# Altium PCB PCB.PcbDoc
Units mm, origin at the board's own origin, x right, y up, seen from the top; angles counter-clockwise.
Board outline 28 x 47 mm, 2 copper layers (Top Layer, Bottom Layer); 22 components, 17 nets, 77 pads, 18 vias.
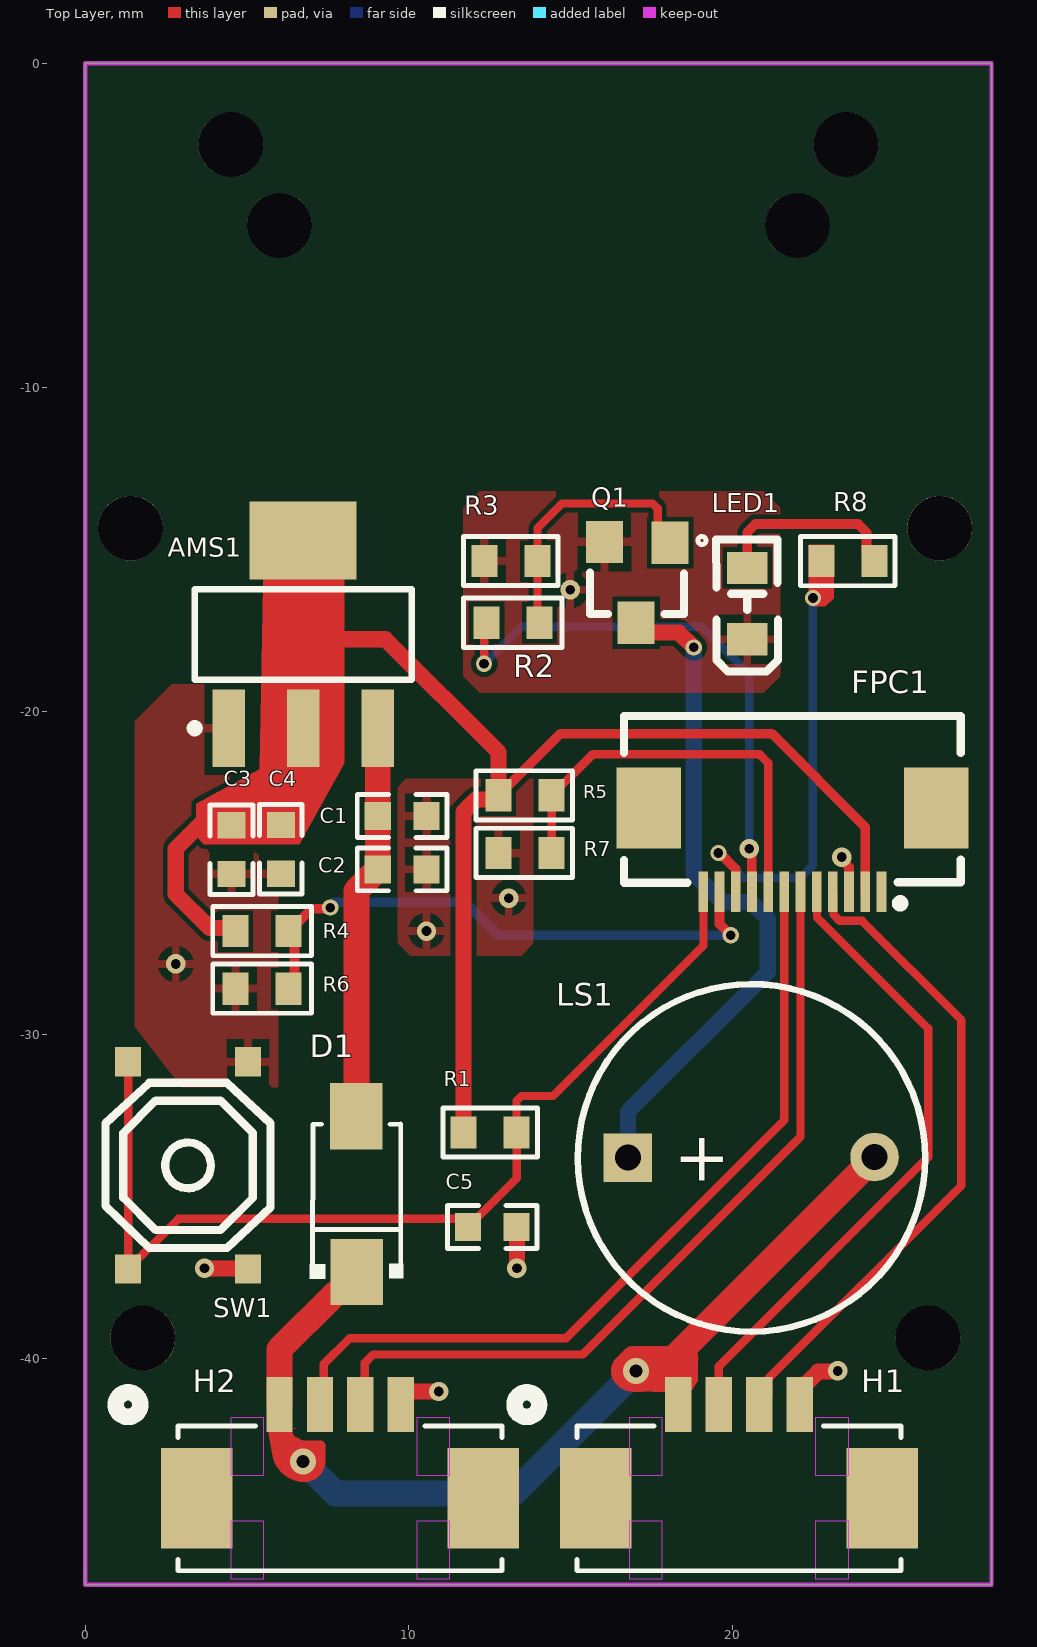
[diagram p0: Top Layer view]
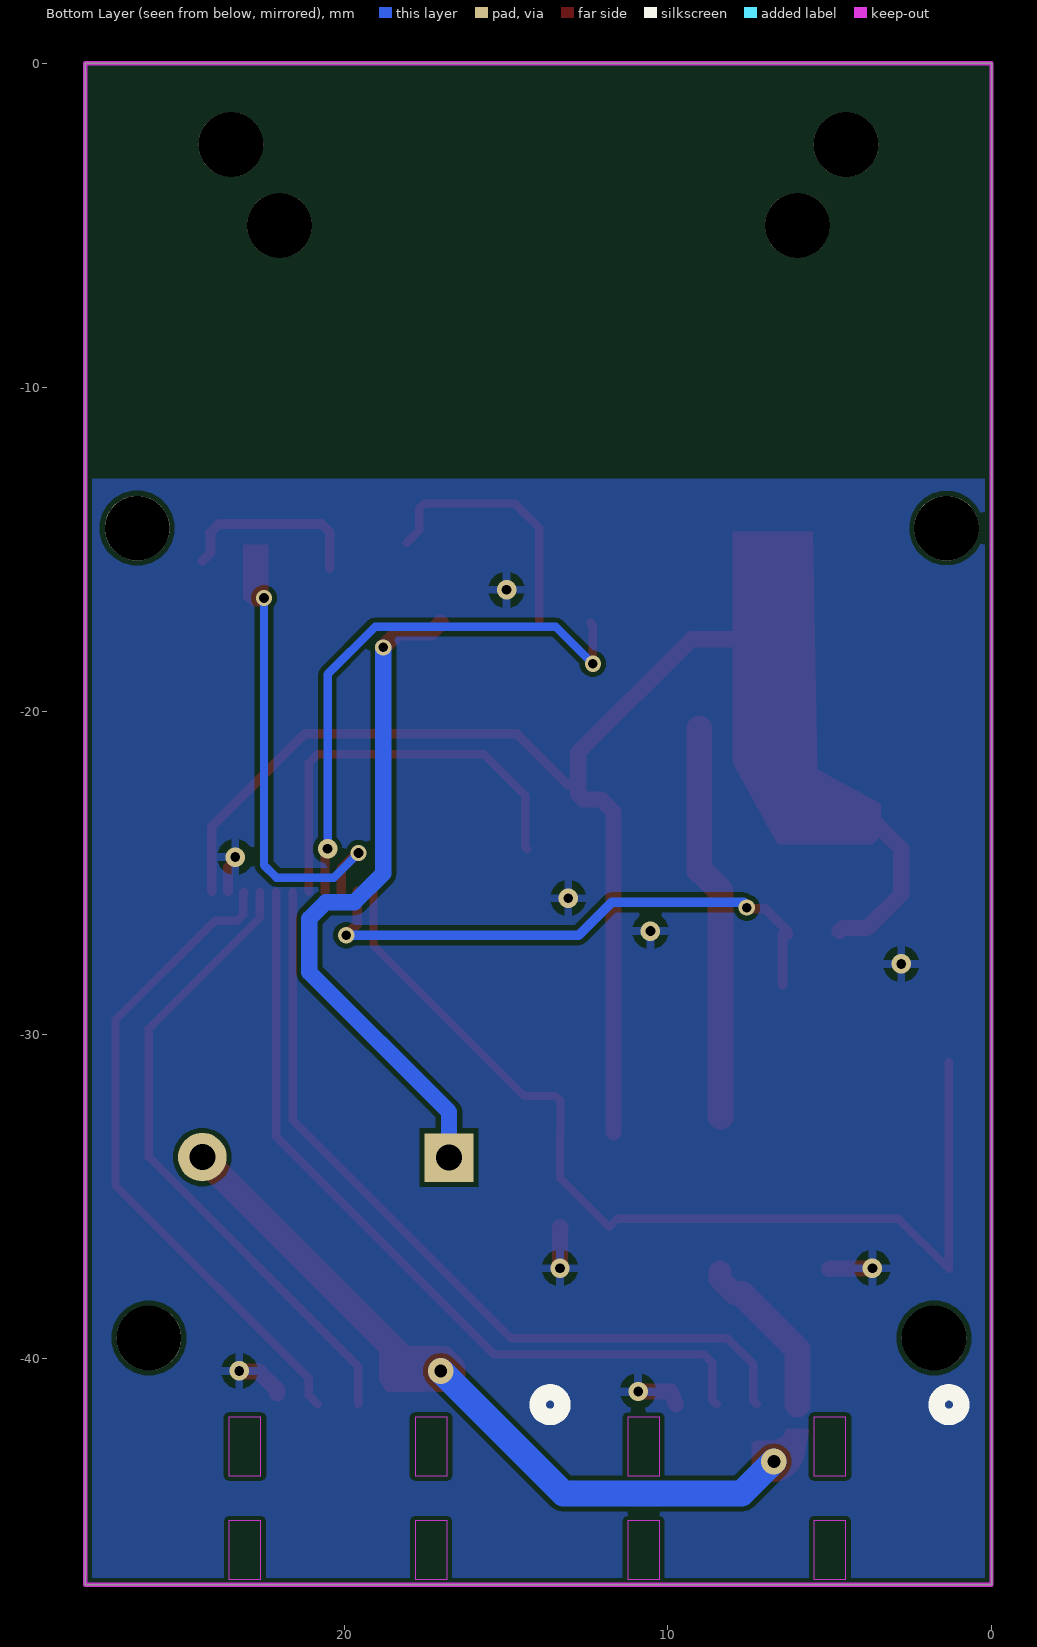
[diagram p1: Bottom Layer view, seen from below]
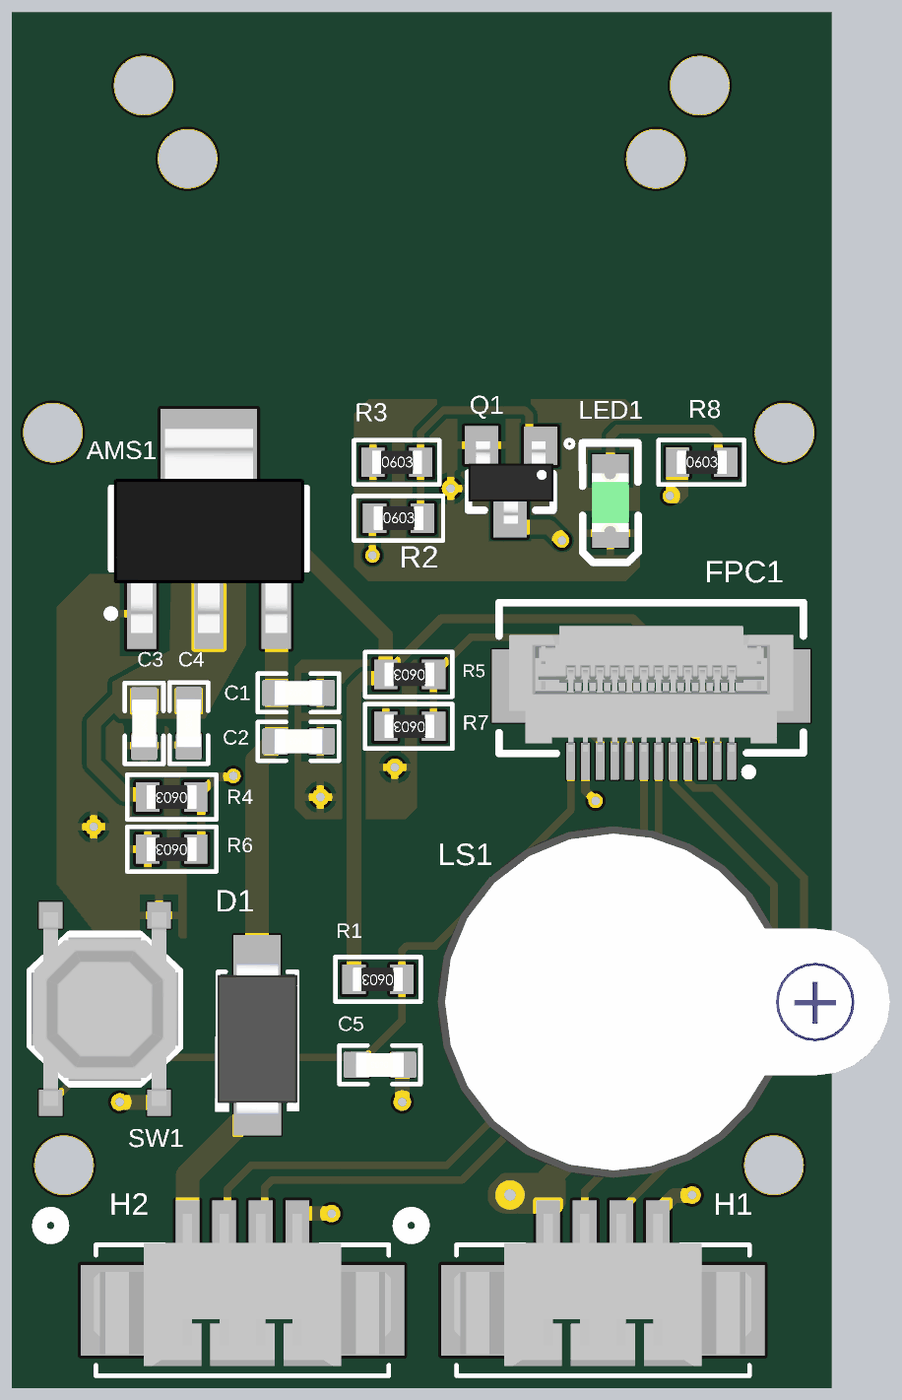
[diagram p2: 3D render of the assembled board from above, using the file's embedded part models]

## Layer stack, top to bottom
Top Solder: solder mask 0.0102, Solder Resist, Dk 3.5
Top Layer: signal copper 0.0356
Dielectric 1: dielectric 0.32, FR-4, Dk 4.8
Bottom Layer: signal copper 0.0356
Bottom Solder: solder mask 0.0102, Solder Resist, Dk 3.5

## Board outline
0,-46.99 0,0.01 28,0.01 28,-46.99

## Design rules (kind name [scope] priority, off if disabled: settings)
Clearance [All] p1: gap=0.15 ignorepadtopadclearanceinfootprint=FALSE
MinimumSolderMaskSliver [All] p1: minsoldermaskwidth=0.09
PolygonConnect [All] p1: connectstyle=Relief reliefconductorwidth=0.254 reliefentries=4 polygonreliefangle="90 Angle" airgapwidth=0.254
RoutingVias [All] p1: holewidth=0.711 width=1.27 viastyle="Through Hole" minholewidth=0.2 minwidth=0.4 maxholewidth=0.711 maxwidth=1.27
SilkToSolderMaskClearance [IsPad] p1: minsilkscreentomaskgap=0.15 clearancetoexposedcopper=TRUE
SolderMaskExpansion [All] p1: expansion=0.102 istentingtop=FALSE
Width [All] p1: maxlimit=1 minlimit=0.254 preferedwidth=1 minimp=50.000000 maximp=50.000000 favimp=50.000000
28 further rules are at their usual default settings.

## Components (designator, comment, footprint, x,y, rotation, side; value= is the part's Value field where it differs from the comment)
AMS1 "AMS1117-3.3V" SOT223 6.731,-17.632 r0 top value="AMS1117-3.3V SOT223"
C1 "10uF" Cap0603 9.788,-23.241 r0 top
C2 "100nF" Cap0603 9.788,-24.892 r0 top
C3 "100nF" Cap0603 4.516,-24.282 r270 top
C4 "10uF" Cap0603 6.04,-24.273 r270 top
C5 "100nF" Cap0603 12.573,-35.941 r0 top
D1 "SS14" SMA(DO-214AC) 8.382,-34.925 r90 top
FPC1 "FPC_CONN_0.5mm_12P" FPC-SMD_12P-P0.50_FPC-05F-12PH20 21.844,-23.114 r180 top
H1 "CONN_HDR_4P_1.25" CONN_HDR_4P_1.25mm 20.066,-44.196 r180 top
H2 "CONN_HDR_4P_1.25" CONN_HDR_4P_1.25mm 7.747,-44.196 r180 top
LED1 "LED0805" LED0805-GR 20.442,-16.74 r90 top
LS1 "Coi Chip Speaker" "Coi Chip Speacker" 16.764,-33.795 r0 top
Q1 "SS8050" SOT-23 17.018,-16.002 r180 top
R1 "10K" R0603 12.503,-33.02 r180 top
R2 "1K" R0603 13.208,-17.272 r0 top
R3 "10K" R0603 13.151,-15.367 r0 top
R4 "10K" R0603 5.461,-26.797 r180 top
R5 "10K" R0603 13.589,-22.606 r180 top
R6 "10K" R0603 5.461,-28.575 r180 top
R7 "10K" R0603 13.589,-24.384 r180 top
R8 "510R" R0603 23.565,-15.367 r0 top
SW1 "SW_4P_" SW-SMD_4P-L5.1-W5.1-P3.70-LS6.4_YZA-044-1.5 3.175,-34.036 r90 top

## Footprints (in the part's own frame and the unit in brackets; to place one, negate y for a bottom-side part, rotate by r counter-clockwise, add the part's x,y. Pads: shape width x height; smd on the part's side, far side on the other; paste and mask are expansions set on the pad)
Cap0603 [mm]
  rect 0.806x0.864 smd paste-100 mask+0.051: 1(-0.753,0) 2(0.753,0)
  silkscreen extent -1.39,-0.66 1.39,0.66, body extent -0.82,-0.42 0.82,0.42, height 0.95
"Coi Chip Speacker" [mm]
  rect 1.5x1.5 hole 0.8: 1(0,0)
  round 1.5 hole 0.8: 2(7.62,0.013)
  silkscreen extent -1.55,-5.38 9.18,5.36, body extent -2.22,-6 13.24,6, height 4.5
CONN_HDR_4P_1.25mm [mil]
  rect 32x67 smd paste+0 mask+4.02: 1(68.82,-109.35) 2(19.61,-109.35) 3(-29.61,-109.35) 4(-78.82,-109.35)
  rect 87x122 smd paste+0 mask+4.02: 5(-179.21,4.82) 6(169.21,4.82)
  Keep-Out Layer region: -98.69,32.31 -137.69,32.31 -137.69,103.31 -98.69,103.31
  Keep-Out Layer region: 127.69,32.31 88.69,32.31 88.69,103.31 127.69,103.31
  Keep-Out Layer region: -98.69,-93.67 -137.69,-93.67 -137.69,-22.67 -98.69,-22.67
  Keep-Out Layer region: 127.69,-93.67 88.69,-93.67 88.69,-22.67 127.69,-22.67
  silkscreen extent -202,-124 268,93, body extent -205,-125 195,80, height 126
FPC-SMD_12P-P0.50_FPC-05F-12PH20 [mm]
  rect 0.3x1.25 smd paste+0 mask+0.05: 1(-2.75,2.463) 2(-2.25,2.463) 3(-1.75,2.463) 4(-1.25,2.463) 5(-0.75,2.463) 6(-0.25,2.463) 7(0.25,2.463) 8(0.75,2.463) 9(1.25,2.463) 10(1.75,2.463) 11(2.25,2.463) 12(2.75,2.463)
  rect 2x2.5 smd paste+0 mask+0.05: 13(4.44,-0.112) 14(-4.44,-0.112)
  silkscreen extent -5.2,-2.96 5.2,2.95, body extent -4.85,-2.16 4.85,2.14, height 1.34
LED0805-GR [mm]
  rect 1x1.25 smd paste+0 mask+0.051: 1(-1.04,-0.005) 2(1.16,-0.005)
  silkscreen extent -2.04,-0.96 2.04,0.95, body extent -1,-0.63 1,0.63, height 1.2
R0603 [mm] "Chip Inductor, Body 0.6x0.3mm, IPC High Density"
  rect 0.8x1 smd: 1(-0.819,0) 2(0.819,0)
  silkscreen extent -1.47,-0.76 1.45,0.76, body extent -0.84,-0.4 0.86,0.4, height 0.56
SMA(DO-214AC) [mm]
  rect 2.046x1.62 smd paste+0 mask+0.051: 1(-2.404,-0.009) 2(2.404,0.009)
  silkscreen extent -2.61,-1.44 2.16,1.44, body extent -2.73,-1.37 2.47,1.36, height 2.5
SOT223 [mm]
  rect 1x2.4 smd: 1(-2.3,-2.9) 2(0,-2.9) 3(2.3,-2.9)
  rect 3.3x2.4 smd: 4(0,2.9)
  silkscreen extent -3.47,-3.02 3.35,1.4, body extent -3.25,-3.56 3.25,3.4, height 1.68
SOT-23 [mm]
  rect 1.143x1.3 smd: 1(-1.05,-1.2) 2(0.975,-1.225) 3(0,1.27)
  silkscreen extent -2.16,-1.39 1.42,1, body extent -1.47,-1.35 1.43,1.45
SW-SMD_4P-L5.1-W5.1-P3.70-LS6.4_YZA-044-1.5 [mm]
  rect 0.9x0.8 smd paste+0 mask+0.051: 1(-3.2,1.85) 2(3.2,1.85) 3(-3.2,-1.85) 4(3.2,-1.85)
  silkscreen extent -2.55,-2.55 2.55,2.55, body extent -3.3,-2.5 3.3,2.5, height 1.47

## Part data
AMS1: library part "AMS1117 SMD", "Dán", Chung_Loai=Dán, Don_Vi=Con, Ma_Hang=MH000596
C1 C2 C3 C4 C5: library part "Cap 0603", "Capacitor SMD 0603"
D1: library part DIODE
LS1: "Còi chip"
R1 R2 R3 R4 R5 R6 R7 R8: library part "RES 0603", "RES SMD 0603", Manufacturer="Vishay Dale", Manufacturer Part Number=CRCW040210K0FKED, Operating Temperature="-55°C ~ 155°C", Package / Case="0402 (1005 Metric)", Power (Watts)="0.063W, 1/16W", Resistance (Ohms)=10k, Supplier Part Number 1=541-10.0KLCT-ND, Temperature Coefficient=±100ppm/°C, Tolerance=±1%, Category=Resistors, ComponentLink1Description=http://www.vishay.com/docs/20035/dcrcwe3.pdf, ComponentLink1URL=http://www.vishay.com/docs/20035/dcrcwe3.pdf, Composition="Thick Film", Features="Automotive AEC-Q200", Height="0.016\" (0.40mm)", Number of Terminations=2, Packaging="Cut Tape (CT)", Pricing 1="10=0.083, 50=0.0444, 200=0.0255, 1000=0.0174 (USD)", RoHS="RoHS Compliant", Size / Dimension="0.039\" L x 0.020\" W (1.00mm x 0.50mm)", Stock 1=2392462, Supplier 1=Digi-Key, Supplier Device Package="0402 (1005 Metric)"

## Free pads (board coordinates)
  round 2 hole 2: 10(1.397,-14.351) 10(1.778,-39.37) 10(4.5,-2.5) 10(6,-5) 10(22,-5) 10(23.5,-2.5) 10(26.035,-39.37) 10(26.397,-14.351)

## Via types
v1: diameter 0.6, hole 0.3, Top Layer to Bottom Layer, 9 vias
v2: diameter 0.5, hole 0.3, Top Layer to Bottom Layer, 5 vias
v3: diameter 0.8, hole 0.4, Top Layer to Bottom Layer, 2 vias
v4: diameter 0.6/0.6 (per signal layer), hole 0.3, Top Layer to Bottom Layer, 1 vias
v5: diameter 0.5/0.5 (per signal layer), hole 0.3, Top Layer to Bottom Layer, 1 vias

## Nets (pads, with @x,y where several pads share a name; then routed paths per layer and width w, separated by ;. In a path a pad name is that pad's centre, name@x,y a point inside that pad or via, vN(x,y) a via of type N, cw(c..) or ccw(c..) an arc to the next point about the centre after c; other vN are vias at no path point)
5VDC: 
+3V3: AMS1.2 AMS1.4 C3.1 C4.1 FPC1.2 R1.2 R4.2 R5.2 | length 41.6
  Top Layer w0.3: R5.2@12.77,-22.506 13.02,-22.256 13.12,-22.256 14.675,-20.701 21.209,-20.701 24.094,-23.586 FPC1.2
  Top Layer w0.5: C3.1 3.732,-23.528 3.627,-23.424 2.794,-24.257 2.794,-25.654 3.842,-26.702 4.604,-26.702 R4.2@4.699,-26.797 ; 6.985,-17.653 7.112,-17.78 9.271,-17.78 12.77,-21.279 12.77,-22.506 12.77,-22.583 12.62,-22.733 12.065,-22.733 11.684,-23.114 R1.2
  Top Layer w0.7: 7.239,-20.999 7.239,-20.299
+5V: D1.1 H1.1 H2.1 LS1.2 | length 26
  Top Layer w0.7: D1.1@7.718,-38.002 7.931,-38.002 8.391,-37.542 D1.1
  Top Layer w0.8: H2.1 5.999,-39.721 D1.1@7.718,-38.002 ; 18.318,-39.848 LS1.2
  Bottom Layer w0.8: v3(6.731,-43.18) 7.721,-44.17 13.234,-44.17 v3(17.018,-40.386)
BEEPER: FPC1.9 R2.1 | length 17.4
  Top Layer w0.26: v5(12.319,-18.542) 12.319,-17.342 R2.1 ; FPC1.9@20.574,-25.557 FPC1.9 ; v4@20.574,-24.317 v4(20.514,-24.257) cw(c20.514,-24.337) v4@20.594,-24.337
  Top Layer w0.29: FPC1.9 v4@20.594,-24.337
  Bottom Layer w0.26: v5(12.319,-18.542) 13.462,-17.399 19.05,-17.399 20.514,-18.863 v4(20.514,-24.257)
D+: FPC1.7 H2.2 | length 25.7
  Top Layer w0.26: H2.2 7.366,-41.302 7.366,-40.177 8.173,-39.37 14.859,-39.37 21.594,-32.635 FPC1.7
D-: FPC1.6 H2.3 | length 25.3
  Top Layer w0.26: H2.3 8.636,-41.282 8.636,-40.132 8.89,-39.878 15.367,-39.878 22.094,-33.151 FPC1.6
FLASH_OUT: FPC1.8 R5.1 R7.1 | length 13
  Top Layer w0.26: R7.1@14.351,-24.257 14.408,-24.2 R5.1 15.678,-21.336 20.828,-21.336 21.094,-21.602 FPC1.8
GND: AMS1.1 C1.2 C2.2 C3.2 C4.2 C5.2 FPC1.3 H1.4 H2.4 LED1.1 Q1.2 R3.1 R6.2 R7.2 SW1.3 SW1.4 | length 6.7
  Top Layer w0.3: v1(23.368,-24.511) 23.368,-24.592 23.594,-24.818 FPC1.3
  Top Layer w0.5: v1(3.683,-37.211) 3.695,-37.223 5.013,-37.223 SW1.3 ; H2.4 9.905,-41.021 v1(10.922,-41.021) ; C5.2 13.335,-36.123 v1(13.335,-37.211) ; H1.4@22.068,-41.078 22.068,-40.974 22.637,-40.405 23.222,-40.405 v1(23.241,-40.386)
  other v1: 2.794,-27.813 10.541,-26.797 13.081,-25.781 14.986,-16.256
NetAMS1_3: AMS1.3 C1.1 C2.1 D1.2 | length 12.3
  Top Layer w0.8: D1.2 8.373,-25.554 9.003,-24.924 9.031,-24.924 9.035,-24.921 C1.1 AMS1.3@9.035,-20.535
NetLED1_2: LED1.2 R8.2 | length 6
  Top Layer w0.3: LED1.2 20.447,-14.478 20.701,-14.224 23.876,-14.224 24.134,-14.482 24.134,-15.117 R8.2
NetLS1_1: LS1.1 Q1.3 | length 21.1
  Top Layer w0.5: Q1.3 17.323,-17.577 18.339,-17.577 v2(18.796,-18.034)
  Bottom Layer w0.5: LS1.1 16.764,-32.385 21.082,-28.067 21.082,-26.416 20.574,-25.908 19.685,-25.908 18.796,-25.019 v2(18.796,-18.034)
NetQ1_1: Q1.1 R2.2 R3.2 | length 8.2
  Top Layer w0.26: R2.2@13.984,-17.229 13.97,-17.215 R3.2 13.97,-14.351 14.732,-13.589 17.526,-13.589 17.678,-13.741 17.678,-14.412 Q1.1
PASS_LED: FPC1.10 R8.1 | length 14.3
  Top Layer w0.26: v2(22.479,-16.51) 22.479,-15.634 R8.1
  Top Layer w0.3: v2@19.565,-24.384 19.6,-24.384 20.094,-24.878 FPC1.10
  Bottom Layer w0.26: v2(19.558,-24.384) 20.32,-25.146 22.098,-25.146 22.479,-24.765 v2(22.479,-16.51)
RESET: FPC1.11 R4.1 R6.1 | length 17.6
  Top Layer w0.3: R4.1@6.28,-26.924 6.28,-26.824 6.993,-26.111 7.527,-26.111 v2(7.566,-26.073) ; R4.1@6.337,-26.797 6.464,-26.924 R6.1@6.464,-28.448 ; FPC1.11 19.594,-26.579 v2(19.939,-26.924)
  Bottom Layer w0.3: v2@7.623,-25.946 7.661,-25.908 11.738,-25.908 12.754,-26.924 v2(19.939,-26.924)
RXD: FPC1.4 H1.3 | length 20.5
  Top Layer w0.26: H1.3 21.094,-41.142 21.094,-40.628 26.924,-34.798 27.065,-34.657 27.065,-29.548 23.999,-26.482 23.307,-26.482 23.114,-26.289 23.114,-25.597 FPC1.4
TRIG: C5.1 FPC1.12 R1.1 SW1.1 SW1.2 | length 31.6
  Top Layer w0.254: SW1.2 SW1.1 2.874,-35.687 11.566,-35.687 C5.1 13.332,-34.429 R1.1@13.332,-33.03 ; R1.1 13.322,-32.039 13.471,-31.89 14.453,-31.89 19.094,-27.248 FPC1.12
TXD: FPC1.5 H1.2 | length 19.9
  Top Layer w0.26: H1.2 19.568,-40.249 26.035,-33.782 26.035,-29.803 22.605,-26.373 22.605,-25.588 FPC1.5
pads on no net: FPC1.1 FPC1.13 FPC1.14 H1.5 H1.6 H2.5 H2.6

## Polygon pours and split planes (outlines as drawn)
GND on Top Layer "GND_L01_P001" (solid, pour order 1): 12.192,-13.208 20.955,-13.208 21.463,-13.716 21.463,-18.923 20.955,-19.431 12.192,-19.431 11.684,-18.923 11.684,-13.716
GND on Top Layer "GND_L01_P006" (solid, pour order 6): 9.652,-22.352 9.652,-27.178 10.033,-27.559 13.462,-27.559 13.843,-27.178 13.843,-22.098 9.906,-22.098
GND on Top Layer "GND_L01_P005" (solid, pour order 5): 2.667,-19.177 5.969,-19.177 5.969,-31.623 2.98,-31.623 1.524,-29.758 1.524,-20.32
GND on Bottom Layer "GND_L02_P000" (solid, pour order 0): 0,-12.827 28.067,-12.827 28.067,-47.117 0,-47.117 0,-46.99

## Keep-outs
Keep-Out Layer:
  the board outline again, w0.127

## Other copper
Top Layer:
  region net +5V: 5.769,-42.927 ccw(c6.777,-42.799) 6.777,-43.815 ccw(c6.777,-43.18) 7.412,-43.18 7.412,-42.672 ccw(c7.285,-42.672) 7.285,-42.545 6.777,-42.545 cw(c6.777,-42.291) 6.597,-42.471 6.477,-42.418 6.44,-42.381 6.35,-42.164 6.29,-42.164 6.523,-42.164 5.923,-42.164 5.715,-42.164 5.655,-42.234
  region net +5V: 16.891,-39.624 ccw(c16.891,-39.93) 16.674,-39.714 16.51,-39.878 16.383,-40.005 ccw(c16.689,-40.311) 16.256,-40.312 16.256,-40.46 ccw(c16.69,-40.46) 16.383,-40.767 16.457,-40.841 ccw(c16.891,-40.408) 16.891,-41.021 17.219,-41.021 ccw(c17.219,-40.587) 17.261,-41.019 17.526,-41.021 18.669,-41.021 18.739,-40.986 18.923,-40.689 18.923,-40.132 cw(c19.508,-40.132) 18.928,-40.053 18.901,-39.802 ccw(c18.352,-40.005) 18.796,-39.624 18.923,-39.624
  region net +3V3: 5.524,-14.462 8.001,-14.462 8.001,-21.606 6.604,-24.114 3.667,-24.114 3.429,-23.876 3.429,-22.86 5.39,-21.795
  region net PASS_LED: 22.352,-14.859 23.114,-14.859 23.114,-16.51 22.86,-16.764 22.479,-16.764 22.352,-16.383 22.352,-15.875

## Text inside footprints (layer, text, board x,y; h text height)
LS1: Top Overlay "+" at 18.174,-34.506 h1.52